# Altium PCB CombCombiner.PcbDoc
Units mil, origin at the board's own origin, x right, y up, seen from the top; angles counter-clockwise.
Board outline 2157 x 1291 mil, 4 copper layers (Top Layer, InternalPlane1, InternalPlane2, Bottom Layer); 35 components, 33 nets, 236 pads, 0 vias.
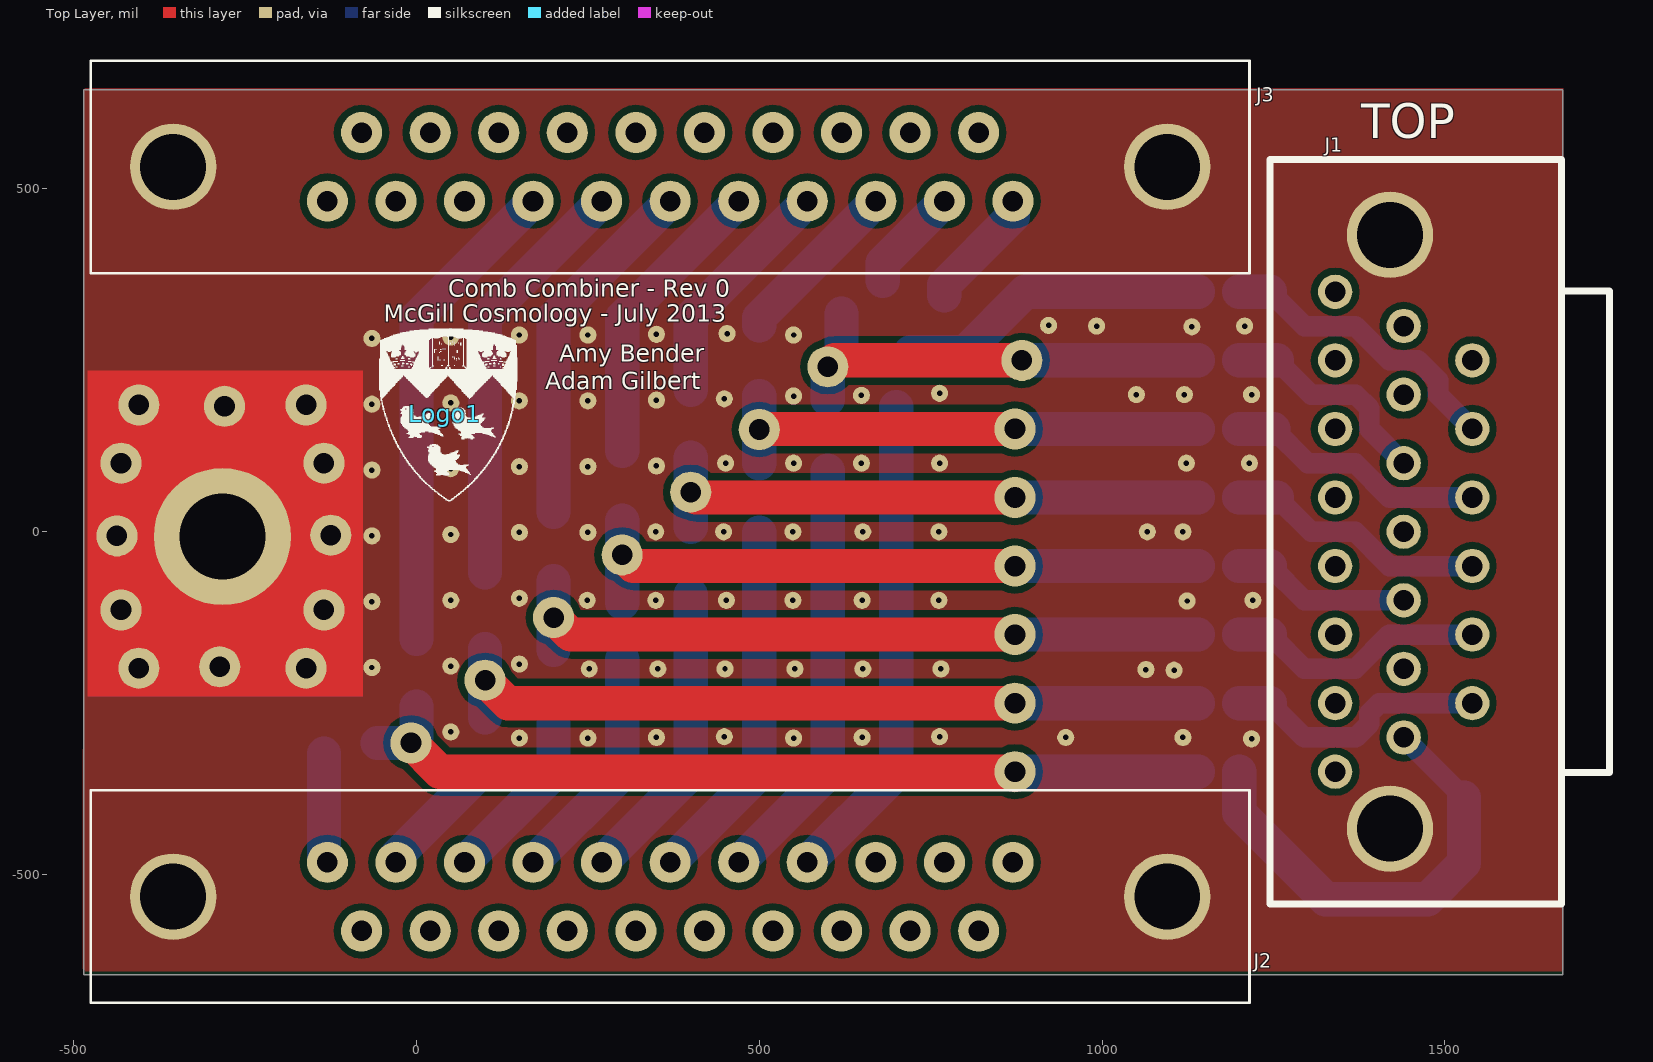
[diagram p0: Top Layer view]
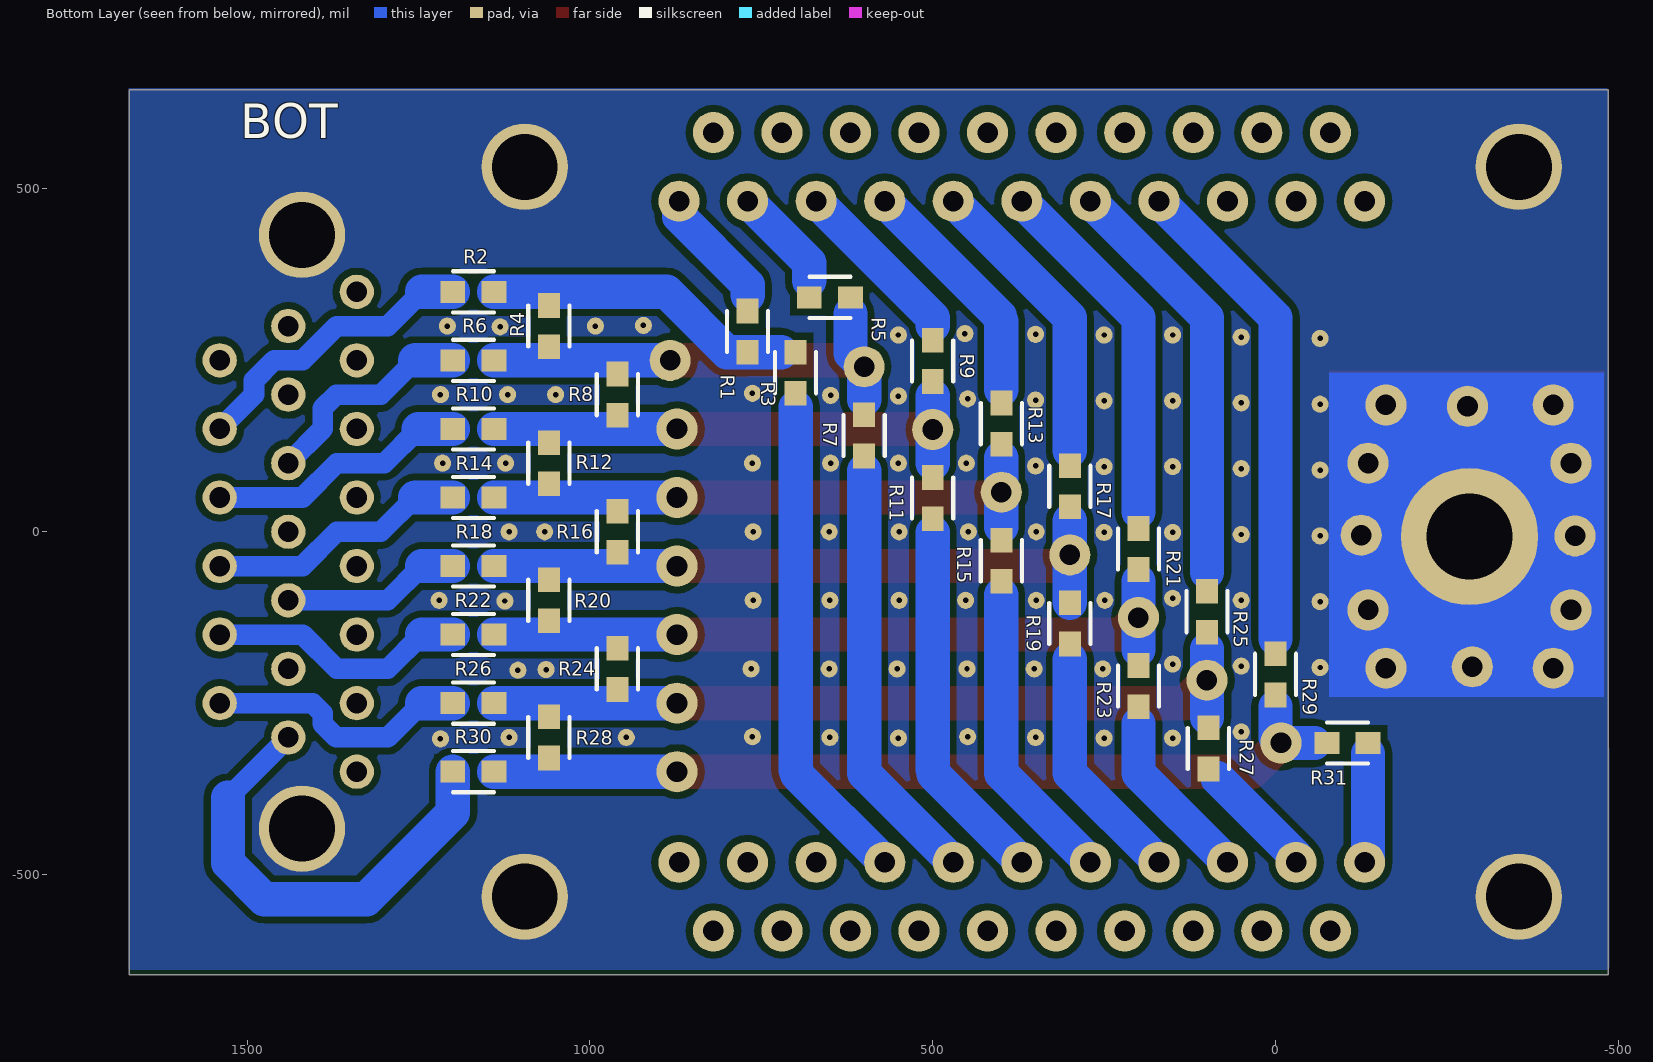
[diagram p1: Bottom Layer view, seen from below]
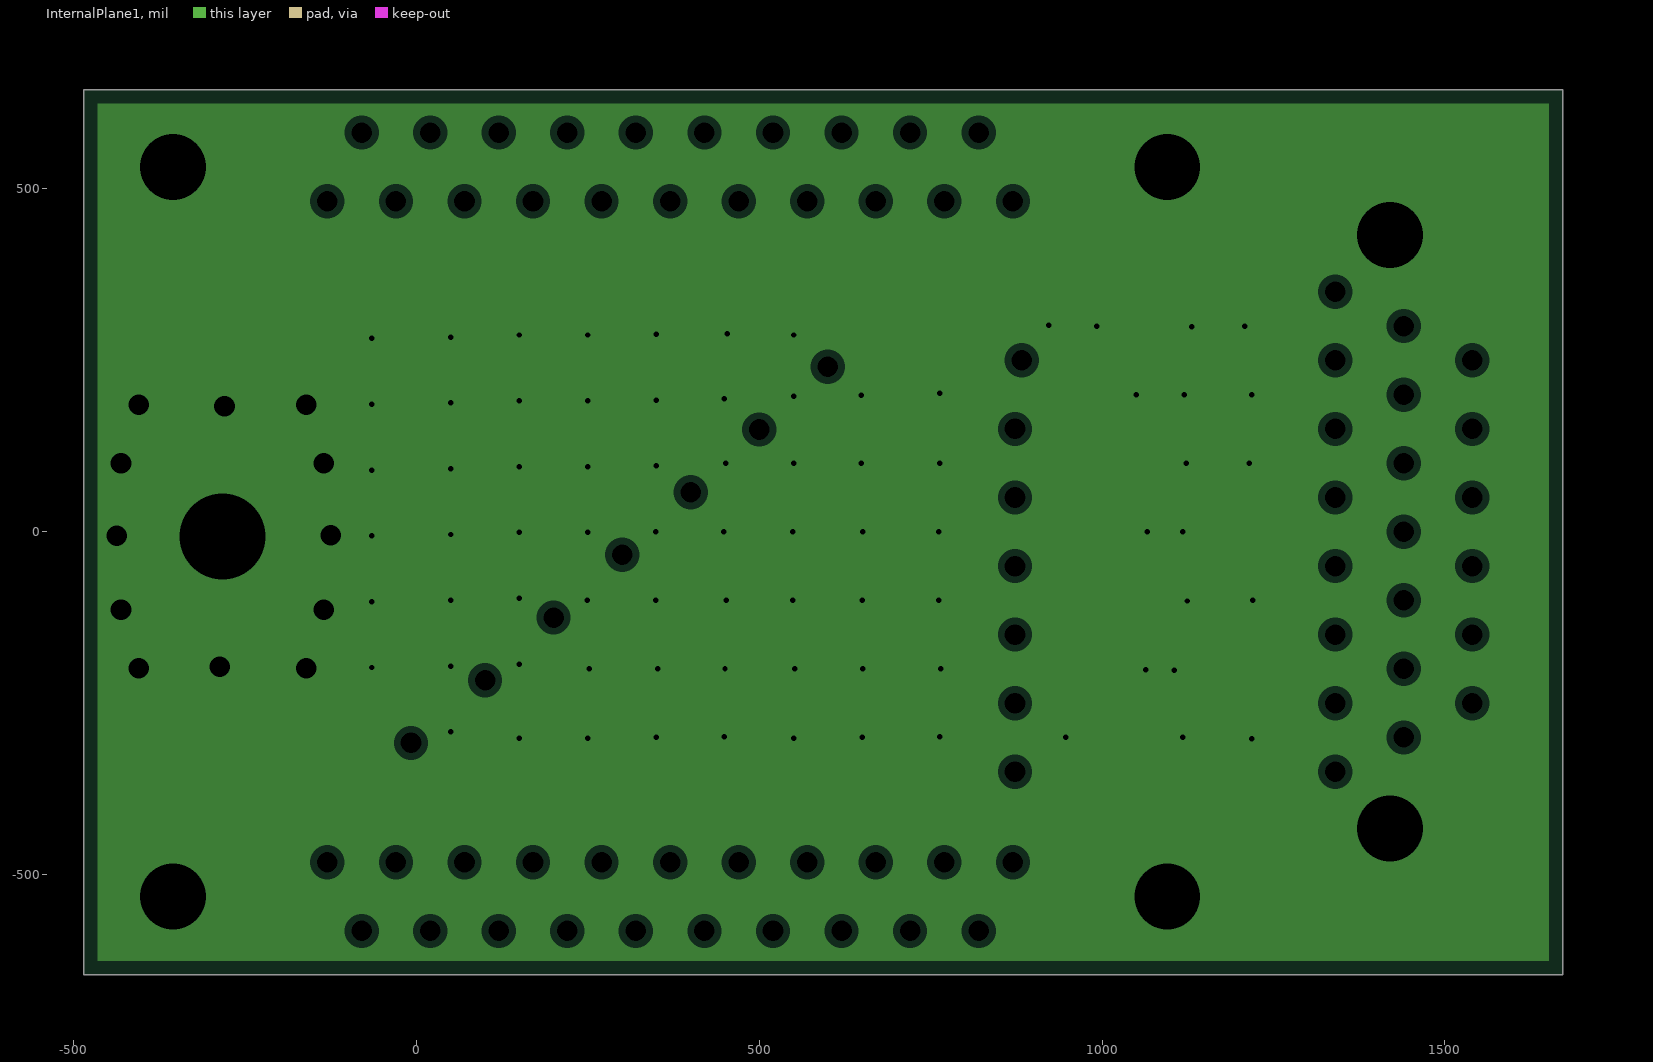
[diagram p2: InternalPlane1, clearances drawn from the general rule]
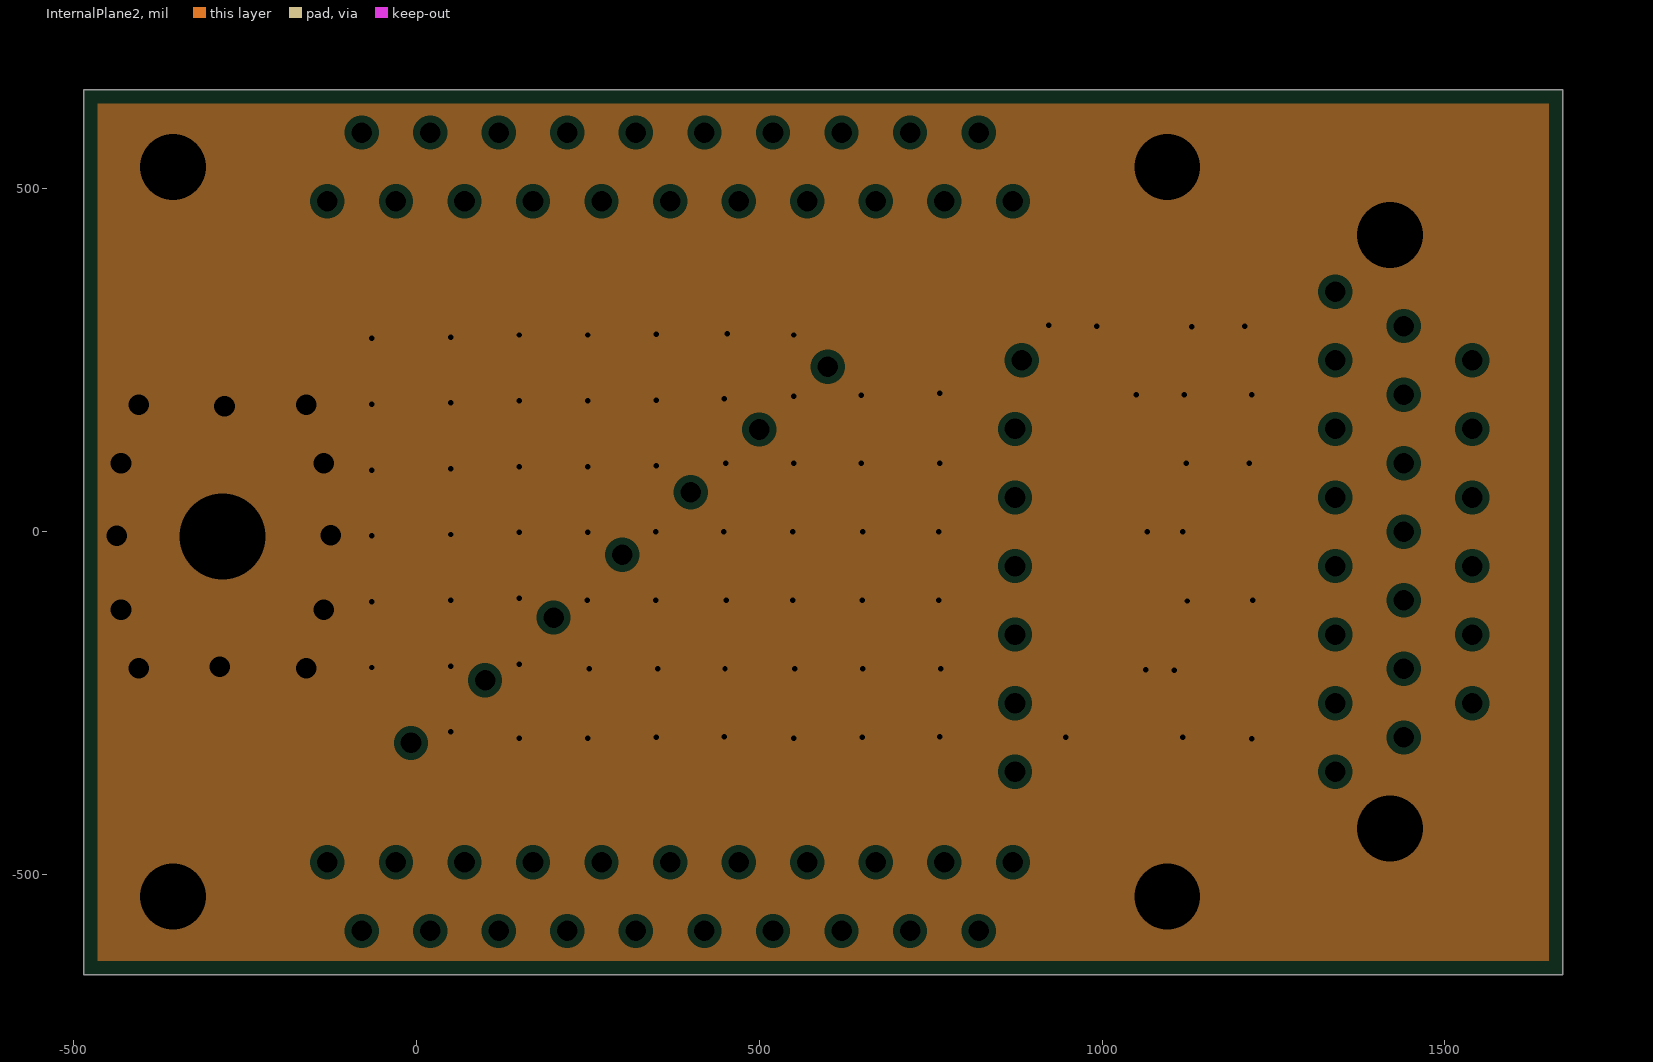
[diagram p3: InternalPlane2, clearances drawn from the general rule]

## Layer stack, top to bottom
Top Layer: signal copper 1.4
Dielectric: core 12.6, FR-4, Dk 4.8
InternalPlane1: plane copper 1.4, net GND
Dielectric: prepreg 12.6, FR-4, Dk 4.8
InternalPlane2: plane copper 1.4, net GND
Dielectric: core 12.6, FR-4, Dk 4.8
Bottom Layer: signal copper 1.4

## Board outline
-485,-646 1672,-646 1672,645 -485,645

## Design rules (kind name [scope] priority, off if disabled: settings)
Clearance [All] p1: gap=10
ComponentClearance [All] p1: gap=4 collisioncheckmode=3 verticalgap=10 showdistances=FALSE
HoleSize [All] p1: absolutevalues=TRUE maxlimit=500 minlimit=1 maxpercent=80.000 minpercent=20.000
PlaneClearance [All] p1: clearance=10
PlaneConnect [All] p1: planeconnectstyle=Direct reliefexpansion=20 reliefentries=4 reliefconductorwidth=10 reliefairgap=10
PolygonConnect [All] p1: connectstyle=Direct reliefconductorwidth=10 reliefentries=4 polygonreliefangle="90 Angle" airgapwidth=10
RoutingVias [All] p1: holewidth=28 width=50 viastyle="Through Hole" minholewidth=28 minwidth=50 maxholewidth=28 maxwidth=50
SilkToSilkClearance [All] p1: silktosilkclearance=4
SilkToSolderMaskClearance [IsPad] p1: minsilkscreentomaskgap=4 clearancetoexposedcopper=TRUE
SolderMaskExpansion [All] p1: expansion=4
Width [All] p1: maxlimit=50 minlimit=1 preferedwidth=10
22 further rules are at their usual default settings.

## Components (designator, comment, footprint, x,y, rotation, side; value= is the part's Value field where it differs from the comment)
J1 "Glenair MWDM2L-21SCBRP-.110" MicroD21Glenair-RA3row 1440,300 r270 top
J2 "Glenair MWDM2L-21PBS-.110" MicroD21Glenair-Vert2row -130,-482.22 r180 top
J3 "Glenair MWDM2L-21PBS-.110" MicroD21Glenair-Vert2row 870,482.22 r0 top
Logo1 "Comment" McGillLogo2 41,172 r0 top
R1 "Res0603" 0603 770,262 r90 bottom
R2 "Res0603" 0603 1140,350 r0 bottom
R3 "Res0603" 0603 700,262 r270 bottom
R4 "Res0603" 0603 1060,270 r90 bottom
R5 "Res0603" 0603 620,342 r0 bottom
R6 "Res0603" 0603 1200,250 r180 bottom
R7 "Res0603" 0603 600,170.57 r270 bottom
R8 "Res0603" 0603 960,170 r90 bottom
R9 "Res0603" 0603 500,219.14 r90 bottom
R10 "Res0603" 0603 1200,150 r180 bottom
R11 "Res0603" 0603 500,79.14 r270 bottom
R12 "Res0603" 0603 1060,70 r90 bottom
R13 "Res0603" 0603 400,127.71 r90 bottom
R14 "Res0603" 0603 1200,50 r180 bottom
R15 "Res0603" 0603 400,-12.29 r270 bottom
R16 "Res0603" 0603 960,-30 r90 bottom
R17 "Res0603" 0603 300,36.29 r90 bottom
R18 "Res0603" 0603 1200,-50 r180 bottom
R19 "Res0603" 0603 300,-103.71 r270 bottom
R20 "Res0603" 0603 1060,-130 r90 bottom
R21 "Res0603" 0603 200,-55.14 r90 bottom
R22 "Res0603" 0603 1200,-150 r180 bottom
R23 "Res0603" 0603 200,-195.14 r270 bottom
R24 "Res0603" 0603 960,-230 r90 bottom
R25 "Res0603" 0603 100,-146.57 r90 bottom
R26 "Res0603" 0603 1200,-250 r180 bottom
R27 "Res0603" 0603 98,-286 r270 bottom
R28 "Res0603" 0603 1060,-330 r90 bottom
R29 "Res0603" 0603 0,-238 r90 bottom
R30 "Res0603" 0603 1200,-350 r180 bottom
R31 "Res0603" 0603 -75,-308 r180 bottom

## Footprints (in the part's own frame and the unit in brackets; to place one, negate y for a bottom-side part, rotate by r counter-clockwise, add the part's x,y. Pads: shape width x height; smd on the part's side, far side on the other; paste and mask are expansions set on the pad)
0603 [mil]
  rect 36x32 smd: 1(0,0) 2(60,0)
  silkscreen extent 0,-30 60,30
McGillLogo2 [mil] "McGillLogo"
  silkscreen extent -95,-127 106,124
MicroD21Glenair-RA3row [mil] "MWDM2L-21SCBRP-.110"
  round 50 hole 30: 1(600,0) 2(550,100) 3(450,100) 4(400,0) 5(350,100) 6(250,100) 7(200,0) 8(150,100) 9(100,0) 10(50,100) 11(0,0) 12(650,-100) 13(550,-100) 14(500,0) 15(450,-100) 16(350,-100) 17(300,0) 18(250,-100) 19(150,-100) 20(50,-100) 21(-50,-100)
  round 125.98 hole 96.06: MH1(-133,-20) MH2(733,-20)
  silkscreen extent -243,-195 843,300
MicroD21Glenair-Vert2row [mil]
  round 60 hole 30: 1(0,0) 2(-100,0) 3(-200,0) 4(-300,0) 5(-400,0) 6(-500,0) 7(-600,0) 8(-700,0) 9(-800,0) 10(-900,0) 11(-1000,0) 12(-50,100) 13(-150,100) 14(-250,100) 15(-350,100) 16(-450,100) 17(-550,100) 18(-650,100) 19(-750,100) 20(-850,100) 21(-950,100)
  round 125.98 hole 96.06: MH1(225,50) MH2(-1225,50)
  silkscreen extent -1345,-105 345,205

## Part data
J1: library part GlenairMicroDsub21-3row, "GlenairMicroDsub21 - 3 row"
J2 J3: library part "GlenairMicroDsub21 -2 row", "GlenairMicroDsub21 -2 row"
R1 R2 R3 R4 R5 R6 R7 R8 R9 R10 R11 R12 R13 R14 R15 R16 R17 R18 R19 R20 R21 R22 R23 R24 R25 R26 R27 R28 R29 R30 R31: "RES 100K OHM 1/10W 1% 0603 SMD"

## Free pads (board coordinates)
  round 200 hole 125: 0(-283,-7)
  round 25 hole 8: 2(-65,-198) 2(-65,-102) 2(-65,-6) 2(-65,90) 2(-65,186) 2(-65,282) 2(50,-292) 2(50,-196) 2(50,-100) 2(50,-4) 2(50,92) 2(50,188) 2(50,284) 2(150,-301) 2(150,-193) 2(150,-97) 2(150,-1) 2(150,95) 2(150,191) 2(150,287) 2(249,-100) 2(250,-301) 2(250,-1) 2(250,95) 2(250,191) 2(250,287) 2(252,-200) 2(349,-100) 2(349,0) 2(350,-300) 2(350,96) 2(350,192) 2(350,288) 2(352,-200) 2(448,0) 2(449,-299) 2(449,194) 2(450,-200) 2(451,100) 2(452,-100) 2(453,289) 2(549,-100) 2(549,0) 2(550,-301) 2(550,100) 2(550,198) 2(550,287) 2(552,-200) 2(649,100) 2(649,199) 2(650,-300) 2(650,-100) 2(651,-200) 2(651,0) 2(762,-100) 2(762,0) 2(763,-299) 2(763,100) 2(763,202) 2(765,-200) 2(922,301) 2(947,-300) 2(992,300) 2(1050,200) 2(1064,-201) 2(1066,0) 2(1105,-202) 2(1118,-300) 2(1118,0) 2(1120,200) 2(1123,100) 2(1124,-101) 2(1131,299) 2(1208,300) 2(1215,100) 2(1218,-302) 2(1218,200) 2(1220,-100)
  round 60 hole 30: 6(-437,-6) 6(-431,-114) 6(-431,100) 6(-405,-199) 6(-405,185) 6(-287,-197) 6(-280,183) 6(-161,-199) 6(-161,185) 6(-135,-114) 6(-135,100) 6(-125,-5) 6(-8,-308) 6(100,-216.57) 6(200,-125.14) 6(300,-33.71) 6(400,57.71) 6(500,149.14) 6(600,240.57) 6(873,-350) 6(873,-250) 6(873,-150) 6(873,-50) 6(873,50) 6(873,150) 6(883,250)

## Nets (pads, with @x,y where several pads share a name; then routed paths per layer and width w, separated by ;. In a path a pad name is that pad's centre, name@x,y a point inside that pad or via, vN(x,y) a via of type N, cw(c..) or ccw(c..) an arc to the next point about the centre after c; other vN are vias at no path point)
GND: J1.MH1 J1.MH2 J2.MH1 J2.MH2 J3.MH1 J3.MH2 pad.0 pad.2 pad.6@-125,-5 pad.6@-135,100 pad.6@-135,-114 pad.6@-161,185 pad.6@-161,-199 pad.6@-280,183 pad.6@-287,-197 pad.6@-405,185 pad.6@-405,-199 pad.6@-431,100 pad.6@-431,-114 pad.6@-437,-6
J1P1: J1.1 R30.1 | length 681.6
  Bottom Layer w30: J1.1 1528,-388
  Bottom Layer w50: R30.1 1200,-410 1326,-536 1475,-536 1528,-483 1528,-388
J1P2: J1.2 R26.1 | length 390.4
  Bottom Layer w30: 1245,-250 1295,-300 1370,-300 1390,-280 1390,-264.64 1404.64,-250 J1.2
  Bottom Layer w50: R26.1 1245,-250
J1P3: J1.3 R22.1 | length 381.4
  Bottom Layer w30: 1245,-150 1295,-200 1369.29,-200 1419.29,-150 J1.3
  Bottom Layer w50: R22.1 1245,-150
J1P4: J1.4 R18.1 | length 260.7
  Bottom Layer w30: 1245,-50 1295,-100 J1.4
  Bottom Layer w50: R18.1 1245,-50
J1P5: J1.5 R14.1 | length 381.4
  Bottom Layer w30: 1255,50 1305,0 1369.29,0 1419.29,-50 J1.5
  Bottom Layer w50: R14.1 1255,50
J1P6: J1.6 R10.1 | length 381.4
  Bottom Layer w30: 1250,150 1300,100 1369.29,100 1419.29,50 J1.6
  Bottom Layer w50: R10.1 1250,150
J1P7: J1.7 R6.1 | length 319.7
  Bottom Layer w30: 1255,250 1305,200 1370,200 1390,180 1390,150 J1.7
  Bottom Layer w50: R6.1 1255,250
J1P8: J1.8 R2.2 | length 435
  Bottom Layer w30: 1245,350 1295,300 1369.29,300 1419.29,250 1460.71,250 1490,220.71 1490,200 J1.8
  Bottom Layer w50: R2.2 1245,350
J2P1: J2.1 R31.2 | length 160.3
  Bottom Layer w50: R31.2@-135,-324 -135,-477.22 J2.1
J2P2: J2.2 R27.2 | length 170.1
  Bottom Layer w50: J2.2 -30,-474 R27.2@84.5,-359.5
J2P3: J2.3 R23.2 | length 256.1
  Bottom Layer w50: J2.3 200,-352.22 200,-280
J2P4: J2.4 R19.2 | length 350.1
  Bottom Layer w50: J2.4 300,-352.22 300,-186
J2P5: J2.5 R15.2 | length 444.1
  Bottom Layer w50: J2.5 400,-352.22 400,-92
J2P6: J2.6 R11.2 | length 535.1
  Bottom Layer w50: J2.6 499,-353.22 499,-348 500,-347 500,-1
J2P7: J2.7 R7.2 | length 625.1
  Bottom Layer w50: J2.7 600,-352.22 600,89
J2P8: J2.8 R3.2 | length 718.1
  Bottom Layer w50: J2.8 698,-354.22 698,-350 700,-348 700,182
J3P1: J3.1 R1.2 | length 178.6
  Bottom Layer w50: 770,345 770,360 870,460 J3.1
J3P2: J3.2 R5.2 | length 153.5
  Bottom Layer w50: 680,366 680,392.22 J3.2
J3P3: J3.3 R9.2 | length 251.6
  Bottom Layer w50: 500,301 500,312.22 J3.3
J3P4: J3.4 R13.2 | length 345.6
  Bottom Layer w50: 400,207 400,307 402,309 402,314.22 J3.4
J3P5: J3.5 R17.2 | length 434.6
  Bottom Layer w50: 300,118 300,312.22 J3.5
J3P6: J3.6 R21.2 | length 523.6
  Bottom Layer w50: 200,29 200,312.22 J3.6
J3P7: J3.7 R25.2 | length 611.6
  Bottom Layer w50: 100,-59 100,312.22 J3.7
J3P8: J3.8 R29.2 | length 708.6
  Bottom Layer w50: 0,-156 0,312.22 J3.8
NetR1_1: R1.1 R2.1 R3.1 R4.2 | length 455.5
  Bottom Layer w50: 721,262 R1.1 800,262 888,350 R2.1
NetR4_1: pad.6@600,240.57 pad.6@883,250 R4.1 R5.1 R6.2 R7.1 R8.2 | length 677.2
  Top Layer w50: pad.6@600,240.57 609.43,250 pad.6@883,250
  Bottom Layer w50: 600,193 600,240.57 620,260.57 620,318 ; pad.6@883,250 R6.2
NetR8_1: pad.6@500,149.14 pad.6@873,150 R8.1 R9.1 R10.2 R11.1 R12.2 | length 741.4
  Top Layer w50: pad.6@502.14,147 500,149.14 500.86,150 pad.6@873,150
  Bottom Layer w50: 500,100 500,149.14 500,198 ; pad.6@873,150 R10.2
NetR12_1: pad.6@400,57.71 pad.6@873,50 R12.1 R13.1 R14.2 R15.1 R16.2 | length 844.2
  Top Layer w50: pad.6@400,57.71 407.71,50 pad.6@873,50
  Bottom Layer w50: 400,7 400,57.71 400,108 ; pad.6@873,50 R14.2
NetR16_1: pad.6@300,-33.71 pad.6@873,-50 R16.1 R17.1 R18.2 R19.1 R20.2 | length 966.5
  Top Layer w50: pad.6@300,-33.71 316.29,-50 pad.6@873,-50
  Bottom Layer w50: R19.1 300,-33.71 300,16 ; pad.6@873,-50 R18.2
NetR20_1: pad.6@200,-125.14 pad.6@873,-150 R20.1 R21.1 R22.2 R23.1 R24.2 | length 1050.3
  Top Layer w50: pad.6@200,-125.14 224.86,-150 pad.6@873,-150
  Bottom Layer w50: 200,-172 200,-125.14 R21.1@200,-72 ; pad.6@873,-150 R22.2
NetR24_1: pad.6@100,-216.57 pad.6@873,-250 R24.1 R25.1 R26.2 R27.1 R28.2 | length 1153.8
  Top Layer w50: pad.6@100,-216.57 133.43,-250 pad.6@873,-250
  Bottom Layer w50: R27.1@100,-271 100,-216.57 100,-171 ; pad.6@873,-250 R26.2
NetR28_1: pad.6@873,-350 pad.6@-8,-308 R28.1 R29.1 R30.2 R31.1 | length 1270.7
  Top Layer w50: pad.6@-8,-308 34,-350 pad.6@873,-350
  Bottom Layer w50: -57,-308 -8,-308 0,-300 R29.1@0,-255 ; pad.6@873,-350 R30.2
pads on no net: J1.9 J1.10 J1.11 J1.12 J1.13 J1.14 J1.15 J1.16 J1.17 J1.18 J1.19 J1.20 J1.21 J2.9 J2.10 J2.11 J2.12 J2.13 J2.14 J2.15 J2.16 J2.17 J2.18 J2.19 J2.20 J2.21 J3.9 J3.10 J3.11 J3.12 J3.13 J3.14 J3.15 J3.16 J3.17 J3.18 J3.19 J3.20 J3.21

## Polygon pours and split planes (outlines as drawn)
no net on Mechanical 1 "MidLayer4-No Net 1" (none): 1672,770 -485,770 -485,-693 1672,-693
GND on Bottom Layer "MidLayer4-No Net 1" (solid, remove dead copper, pour order 5): -485,645.15 -483,647 1673,647 1673,-637.15 1675,-639 -487,-639
GND on Top Layer "MidLayer4-No Net 1" (solid, pour order 4): -485,645.14 -483,647 1673,647 1673,-639.14 1675,-641 -487,-641
GND on InternalPlane1 (split plane): 1651.9,-625.9 -464.9,-625.9 -464.9,624.9 1651.9,624.9
GND on InternalPlane2 (split plane): 1651.9,-625.9 -464.9,-625.9 -464.9,624.9 1651.9,624.9

## Other copper
Top Layer:
  rectangle net GND: -480,-240 -78,235
Bottom Layer:
  rectangle net GND: -479,-241 -78,232

## Silkscreen, mask and mechanical layers (free items; w line width, h text height)
Top Overlay:
  text "TOP" at 1378,574 h50
  text "Comb Combiner - Rev 0" at 46,343 h25
  text "McGill Cosmology - July 2013" at -48,306 h25
  text "Amy Bender" at 208,248 h25
  text "Adam Gilbert" at 188,208 h25
Bottom Overlay:
  text "BOT" at 1510,574 h50
Top Solder:
  rectangle: -488,-640 1674,650
Bottom Solder:
  rectangle: -487,-636 1676,647